# EAGLE board newasnversion2_v1 (EAGLE 9.7.0)
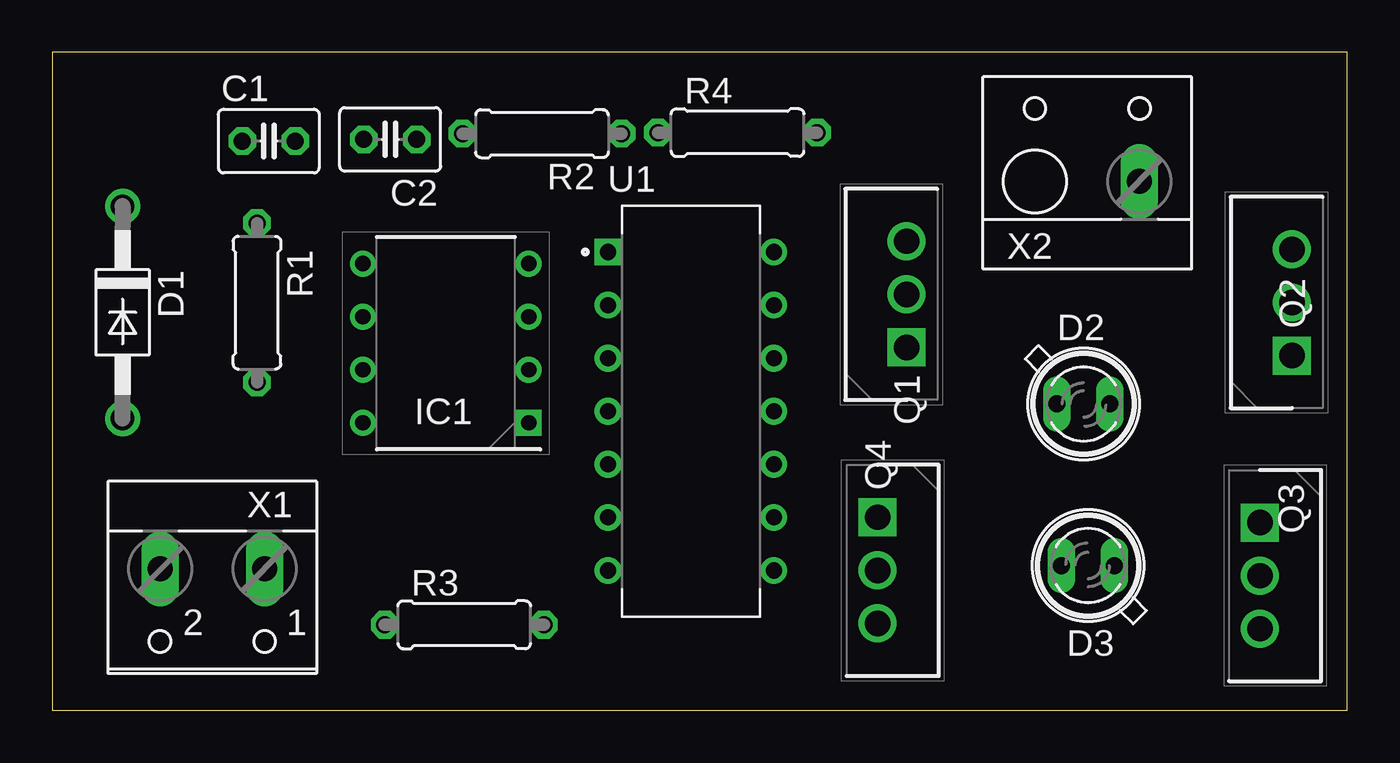
[diagram p0: board, top side]
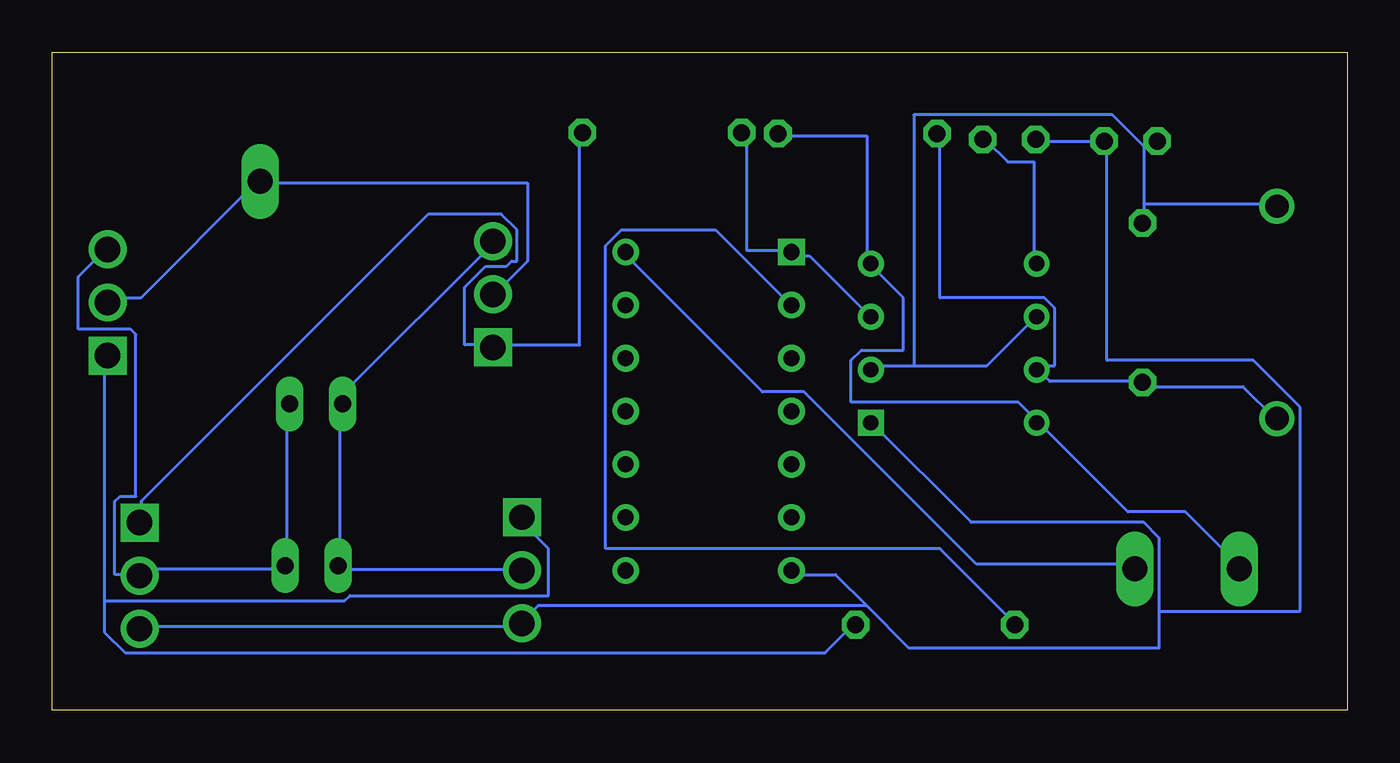
[diagram p1: board, bottom side, seen from below]

Size 62 x 31.5 mm. Coordinates in mm from the lower left corner, seen from the top.
Outline: 0,0 62,0 62,31.5 0,31.5 0,0
Copper layers (1*16): Top 0.035mm / dielectric 1.5mm / Bottom 0.035mm
Design rules "default": minimum track width 6mil, minimum drill 0.35mm, track to track 6mil, track to pad 6mil, pad to pad 6mil, via to via 6mil, smd to smd 6mil, copper to edge 40mil, drill to drill 6mil, minimum pad ring 10mil, minimum via ring 8mil, stop-mask expansion 4mil, vias tented up to drill 0mil, thermal gap 10mil

## Footprints (pad centres in the part's own frame; a part is rotated, then mirrored left to right if it is on the bottom)
C025-030X050 = drill 0.813 octagon: 1 -1.27,0; 2 1.27,0
DO41-10 = drill 1.118: A 5.08,0; C -5.08,0
SFH482 = drill 0.813 long: A -1.27,0; K 1.27,0
DIP794W53P254L959H508Q8N = drill 0.73 pad 1.13 square: 1 -3.97,3.81 | drill 0.73 pad 1.13: 2 -3.97,1.27; 3 -3.97,-1.27; 4 -3.97,-3.81; 5 3.97,-3.81; 6 3.97,-1.27; 7 3.97,1.27; 8 3.97,3.81
TO254P440X1000X1900-3P = drill 1.21 pad 1.815 square: 1 0,0 | drill 1.21 pad 1.815: 2 2.54,0; 3 5.08,0
0207/7 = drill 0.813 octagon: 1 -3.81,0; 2 3.81,0
DIP794W45P254L1969H508Q14 = drill 0.77 pad 1.17 square: 1 -3.97,7.62 | drill 0.77 pad 1.17: 2 -3.97,5.08; 3 -3.97,2.54; 4 -3.97,0; 5 -3.97,-2.54; 6 -3.97,-5.08; 7 -3.97,-7.62; 8 3.97,-7.62; 9 3.97,-5.08; 10 3.97,-2.54; 11 3.97,0; 12 3.97,2.54; 13 3.97,5.08; 14 3.97,7.62
W237-102 = drill 1.194 long: 1 -2.5,-1.27; 2 2.5,-1.27
W237-112 = drill 1.194 long: 1 2.5,-1.27

## Placement (x,y rotation side)
C1  [C025-030X050]  10.37,27.25 0 top
C2  [C025-030X050]  16.18,27.33 180 top
D1  1N4004  [DO41-10]  3.37,19.05 270 top
D2  SFH482  [SFH482]  49.37,14.67 0 top
D3  SFH482  [SFH482]  49.59,6.93 180 top
IC1  NE555P  [DIP794W53P254L959H508Q8N]  18.84,17.58 180 top
Q1  IRFZ44N  [TO254P440X1000X1900-3P]  40.9,17.37 90 top
Q2  IRFZ44N  [TO254P440X1000X1900-3P]  59.35,16.98 90 top
Q3  IRFZ44N  [TO254P440X1000X1900-3P]  57.82,8.99 270 top
Q4  IRFZ44N  [TO254P440X1000X1900-3P]  39.51,9.24 270 top
R1  [0207/7]  9.8,19.51 270 top
R2  [0207/7]  23.45,27.6 180 top
R3  [0207/7]  19.73,4.1 0 top
R4  [0207/7]  32.81,27.65 0 top
U1  SN7404N  [DIP794W45P254L1969H508Q14]  30.58,14.32 0 top
X1  [W237-102]  7.67,5.51 180 top
X2  [W237-112]  49.55,26.59 0 top

## Library data of the parts
C1 C2 = rcl; SPICEPREFIX: C
D1 = diode
D2 D3 = led
IC1 = NE555P; ARROW_PART_NUMBER: NE555P; ARROW_PRICE-STOCK: https://www.arrow.com/en/products/ne555p/texas-instruments?region=nac; DESCRIPTION: Precision timer,NE555P 0.5MHz DIL8 Texas Instruments NE555P, Precision Timer, 4.5 16 V, 8-Pin PDIP; HEIGHT: 5.08mm; MANUFACTURER_NAME: Texas Instruments; MANUFACTURER_PART_NUMBER: NE555P; MOUSER_PART_NUMBER: 595-NE555P; MOUSER_PRICE-STOCK: https://www.mouser.co.uk/ProductDetail/Texas-Instruments/NE555P?qs=rkhjVJ6%2F3EIf4CWgjIKuKQ%3D%3D
Q1-Q4 = IRFZ44N; DESCRIPTION: isc N-Channel MOSFET Transistor; HEIGHT: 4.4mm; MANUFACTURER_NAME: Inchange Semiconductor; MANUFACTURER_PART_NUMBER: IRFZ44N
R1-R4 = rcl; SPICEPREFIX: R
U1 = SN7404N; AVAILABILITY: In Stock; DESCRIPTION: 6-ch, 4.75-V to 5.25-V bipolar inverters; MF: Texas Instruments; MP: SN7404N; PACKAGE: PDIP-14 Texas Instruments; PRICE: None; PURCHASE-URL: https://pricing.snapeda.com/search/part/SN7404N/?ref=eda
X1 = con-wago-500; MPN: 237-102; OC_FARNELL: unknown; OC_NEWARK: 70K9898
X2 = con-wago-500; MPN: 237-112; OC_FARNELL: unknown; OC_NEWARK: 76R2974

## Nets
GND: C1.2 C2.2 IC1.1 Q3.3 Q4.3 U1.7
N$1: Q1.1 Q3.1 R4.2
N$2: C2.1 IC1.5
N$3: D1.A IC1.7 R1.2 R2.2
N$4: C1.1 D1.C IC1.2 IC1.6 R1.1
N$6: IC1.4 IC1.8 R2.1 X1.2
N$7: Q1.2 Q2.2 X2.1
N$8: U1.14 X1.1
N$9: IC1.3 R4.1 U1.1
N$11: Q2.1 Q4.1 R3.2
N$12: D2.K D3.A Q2.3 Q3.2
N$13: D2.A D3.K Q1.3 Q4.2
N$17: R3.1 U1.2

## Tracks (layer width: path | path; a pad name or v marks a point on that pad's centre or on a via)
GND
  Bottom 0.152: C2.2 14.75,27.25 11.75,27.25 C1.2 11.5,27 11.5,16.75 4.5,16.75 2.25,14.5 2.25,4.75 9,4.75 | 9,4.75 9,3 21,3 23,5 | 9,4.75 9,8.25 9.75,9 18,9 22.75,13.75 IC1.1 | 23,5 24.5,6.5 26.5,6.5 U1.7 | 23,5 38.75,5 39.5,4.25 Q4.3 39.75,4 57.75,4 Q3.3
N$1
  Bottom 0.152: R4.2 36.75,27.5 36.75,17.5 40.75,17.5 Q1.1 41,17.5 42.25,17.5 42.25,20.25 41.25,21.25 40.25,21.25 40,21.5 39.75,21.5 39.75,23 40.5,23.75 44,23.75 57.75,10 57.75,9 Q3.1
N$2
  Bottom 0.152: IC1.5 15,21.5 15,26.25 16.25,26.25 17.25,27.25 C2.1
N$3
  Bottom 0.152: R2.2 19.5,27.5 19.5,19.75 14.5,19.75 14,19.25 14,16.5 14.75,16.5 IC1.7 14.75,16.25 14.25,15.75 10,15.75 R1.2 9.75,15.5 5,15.5 3.5,14 D1.A
N$4
  Bottom 0.152: 20.75,16.5 22.75,16.5 IC1.2 | 20.75,16.5 17.25,16.5 15,18.75 IC1.6 | 9.75,27 9.75,24.25 | 9.75,24.25 9.75,23.5 R1.1 | 9.75,27 9.25,27 C1.1 9.75,27 | 9.75,24.25 3.5,24.25 D1.C | 20.75,16.5 20.75,28.5 11.25,28.5 9.75,27
N$6
  Bottom 0.152: R2.1 27.25,27.5 23,27.5 23,21.5 IC1.4 22.75,21.25 21.25,19.75 21.25,17.25 23.25,17.25 23.75,16.75 23.75,14.75 15.75,14.75 15,14 IC1.8 14.75,13.75 10.5,9.5 7.75,9.5 5.25,7 X1.2
N$7
  Bottom 0.152: Q2.2 59.25,19.75 57.75,19.75 52.25,25.25 X2.1 52,25.25 39.25,25.25 39.25,21.5 40.75,20 Q1.2
N$8
  Bottom 0.152: U1.14 34.5,21.75 28,15.25 26,15.25 17.75,7 10.25,7 X1.1
N$9
  Bottom 0.152: IC1.3 23,19 25.75,21.75 26.5,21.75 U1.1 26.75,22 28.75,22 28.75,27.5 R4.1
N$11
  Bottom 0.152: 59.5,5.25 59.5,16.75 Q2.1 | 59.5,5.25 59.5,3.75 58.5,2.75 25,2.75 23.75,4 R3.2 | 59.5,5.25 48,5.25 47.75,5.5 38.25,5.5 38.25,7.75 39.5,9 Q4.1
N$12
  Bottom 0.152: D2.K 50.75,14.5 50.75,7 D3.A 51,6.75 57.5,6.75 57.75,6.5 Q3.2 58,6.5 59,6.5 59,10 58.75,10.25 58,10.25 58,18 58.25,18.25 60.75,18.25 60.75,20.75 59.5,22 Q2.3
N$13
  Bottom 0.152: Q4.2 39.75,6.75 48.25,6.75 D3.K 48.25,7 48.25,14.5 D2.A 48,14.75 48,15.25 41,22.25 Q1.3
N$17
  Bottom 0.152: U1.2 26.75,19.5 30.25,23 34.75,23 35.5,22.25 35.5,7.75 19.5,7.75 16,4.25 R3.1